# EAGLE board lv2-can-cable (EAGLE 4.09)
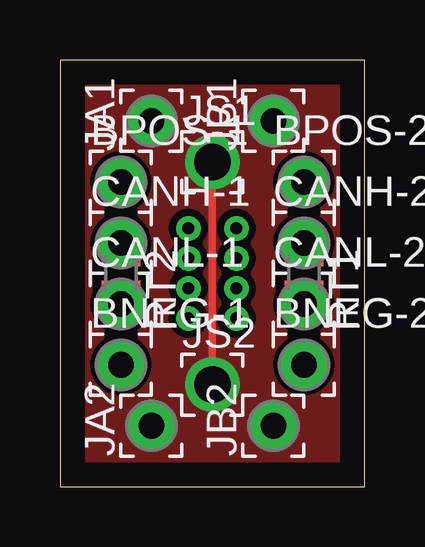
[diagram p0: board, top side]
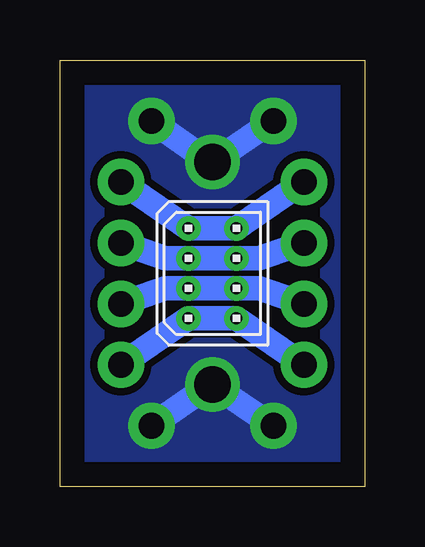
[diagram p1: board, bottom side, seen from below]

Size 12.7 x 17.78 mm. Coordinates in mm from the lower left corner, seen from the top.
Outline: 0,0 12.7,0 12.7,17.78 0,17.78 0,0
Copper layers used: Top, Bottom
tRestrict: 12 lines
bRestrict: 6 lines

## Footprints (pad centres in the part's own frame; a part is rotated, then mirrored left to right if it is on the bottom)
PAD_ROUND_APC-FREE_0.1/042 = drill 1.067 pad 1.93 round: PAD 0,0
JST-08R-JED = drill 0.508 pad 1.016 round: 1 1.875,1; 2 1.875,-1; 3 0.625,1; 4 0.625,-1; 5 -0.625,1; 6 -0.625,-1; 7 -1.875,1; 8 -1.875,-1
PAD_ROUND_APC-FREE_0.1/0595 = drill 1.511 round: PAD 0,0
M0805 = smd 1.3 x 1.6: 1 -0.95,0; 2 0.95,0

## Placement (x,y rotation side)
BNEG-1  PAD_ROUND042  [PAD_ROUND_APC-FREE_0.1/042]  2.54,5.08 0 top
BNEG-2  PAD_ROUND042  [PAD_ROUND_APC-FREE_0.1/042]  10.16,5.08 0 top
BPOS-1  PAD_ROUND042  [PAD_ROUND_APC-FREE_0.1/042]  2.54,12.7 0 top
BPOS-2  PAD_ROUND042  [PAD_ROUND_APC-FREE_0.1/042]  10.16,12.7 0 top
CANCON  CONN_JED_RECEPTACLE_8  [JST-08R-JED]  6.35,8.89 90 bottom
CANH-1  PAD_ROUND042  [PAD_ROUND_APC-FREE_0.1/042]  2.54,10.16 0 top
CANH-2  PAD_ROUND042  [PAD_ROUND_APC-FREE_0.1/042]  10.16,10.16 0 top
CANL-1  PAD_ROUND042  [PAD_ROUND_APC-FREE_0.1/042]  2.54,7.62 0 top
CANL-2  PAD_ROUND042  [PAD_ROUND_APC-FREE_0.1/042]  10.16,7.62 0 top
JA1  PAD_ROUND042  [PAD_ROUND_APC-FREE_0.1/042]  3.81,15.24 90 top
JA2  PAD_ROUND042  [PAD_ROUND_APC-FREE_0.1/042]  3.81,2.54 90 top
JB1  PAD_ROUND042  [PAD_ROUND_APC-FREE_0.1/042]  8.89,15.24 90 top
JB2  PAD_ROUND042  [PAD_ROUND_APC-FREE_0.1/042]  8.89,2.54 90 top
JS1  PAD_ROUND0595  [PAD_ROUND_APC-FREE_0.1/0595]  6.35,13.53 0 top
JS2  PAD_ROUND0595  [PAD_ROUND_APC-FREE_0.1/0595]  6.35,4.25 0 top
RT1  [M0805]  10.16,8.89 270 top
RT2  [M0805]  2.54,8.89 270 top

## Library data of the parts
BNEG-1 BNEG-2 BPOS-1 BPOS-2 CANCON CANH-1 CANH-2 CANL-1 CANL-2 JA1 JA2 JB1 JB2 JS1 JS2 = psas_eagle_library
RT1 RT2 = rcl

## Nets
B+: BPOS-1.PAD BPOS-2.PAD CANCON.1 CANCON.2
B-: BNEG-1.PAD BNEG-2.PAD CANCON.7 CANCON.8
CANH: CANCON.3 CANCON.4 CANH-1.PAD CANH-2.PAD RT1.1 RT2.1
CANL: CANCON.5 CANCON.6 CANL-1.PAD CANL-2.PAD RT1.2 RT2.2
CHASSIS: JA1.PAD JA2.PAD JB1.PAD JB2.PAD JS1.PAD JS2.PAD

## Tracks (layer width: path | path; a pad name or v marks a point on that pad's centre or on a via)
B+
  Bottom 1.016: BPOS-1.PAD CANCON.2 CANCON.1 BPOS-2.PAD
B-
  Bottom 1.016: BNEG-1.PAD CANCON.8 CANCON.7 BNEG-2.PAD
CANH
  Top 1.016: CANH-2.PAD RT1.1 | RT2.1 CANH-1.PAD
  Bottom 1.016: CANH-1.PAD 4.39,9.52 CANCON.4 CANCON.3 8.31,9.52 CANH-2.PAD
CANL
  Top 1.016: CANL-2.PAD RT1.2 | RT2.2 CANL-1.PAD
  Bottom 1.016: CANL-1.PAD 4.39,8.27 CANCON.6 CANCON.5 8.31,8.27 CANL-2.PAD
CHASSIS
  Top 0.305: 6.35,4.32 6.35,13.46
  Bottom 1.016: JS1.PAD JA1.PAD | 6.35,13.46 JB1.PAD | JB2.PAD 6.35,4.32 JS2.PAD JA2.PAD
  pour Top (isolate 0.305, no thermals): 0,0 0,17.78 12.7,17.78 12.7,0
  pour Bottom (isolate 0.305, no thermals): 0,0 0,17.78 12.7,17.78 12.7,0